# EAGLE board PCB (EAGLE 9.7.0)
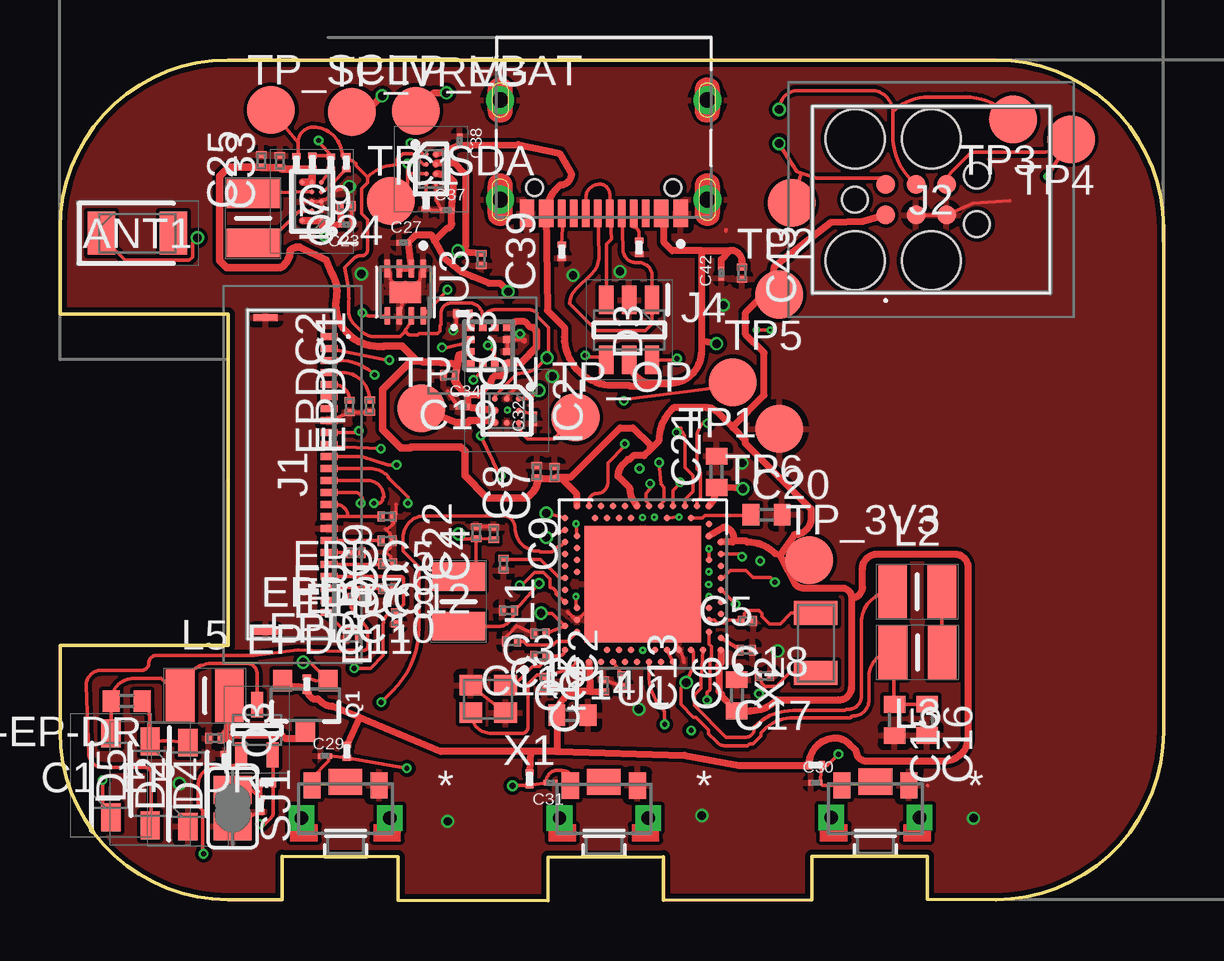
[diagram p0: board, top side]
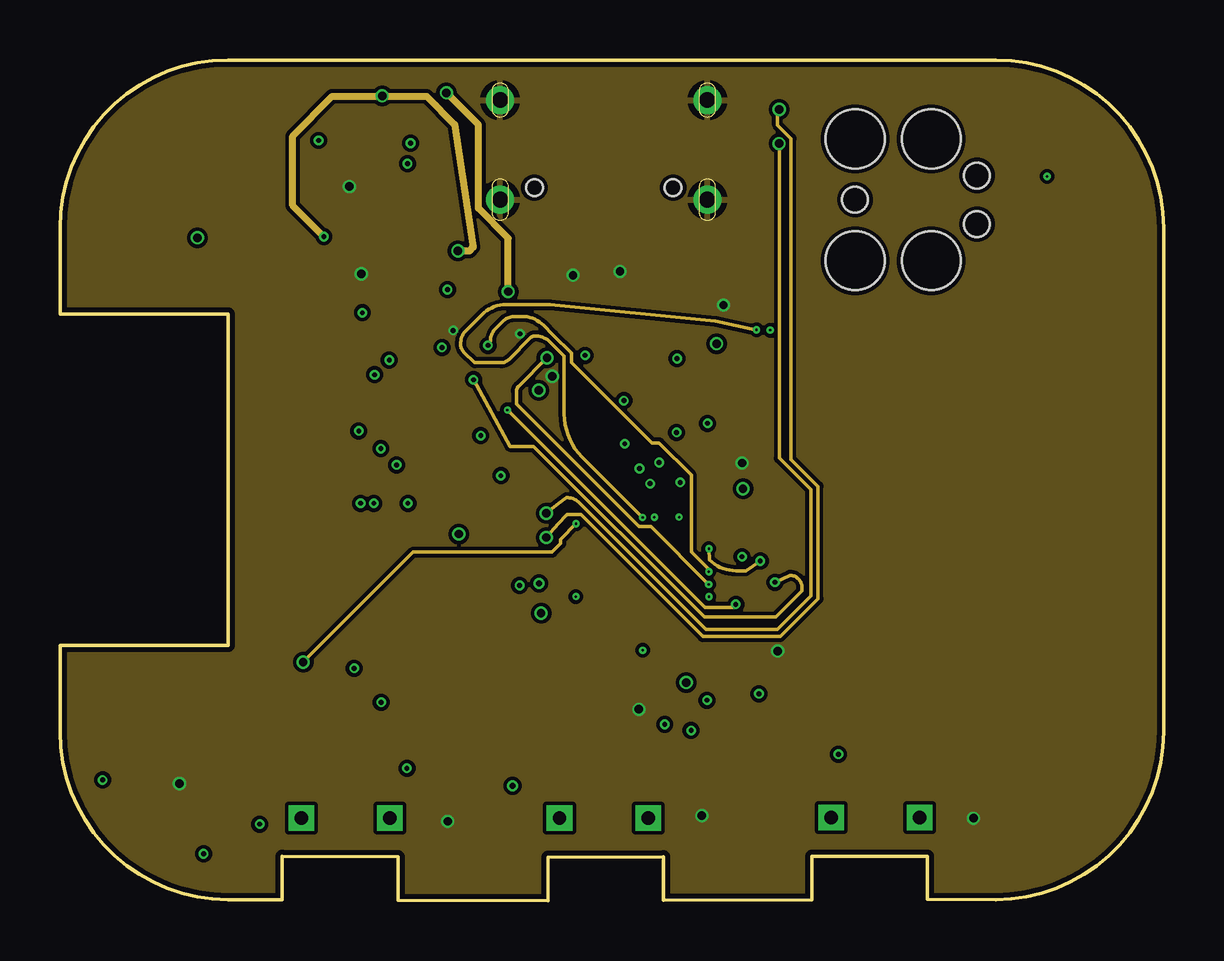
[diagram p1: board, inner layer Route2]
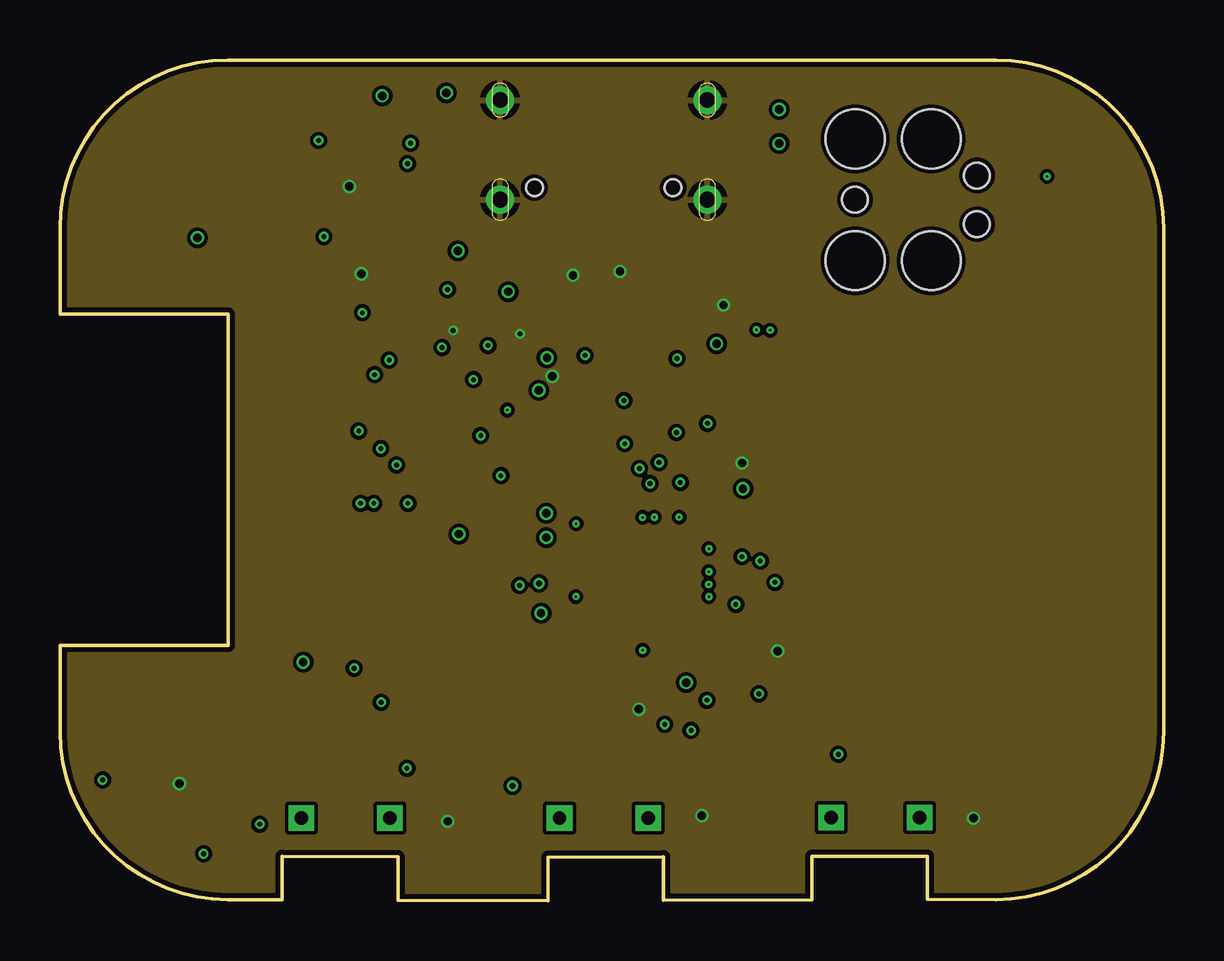
[diagram p2: board, inner layer Route15]
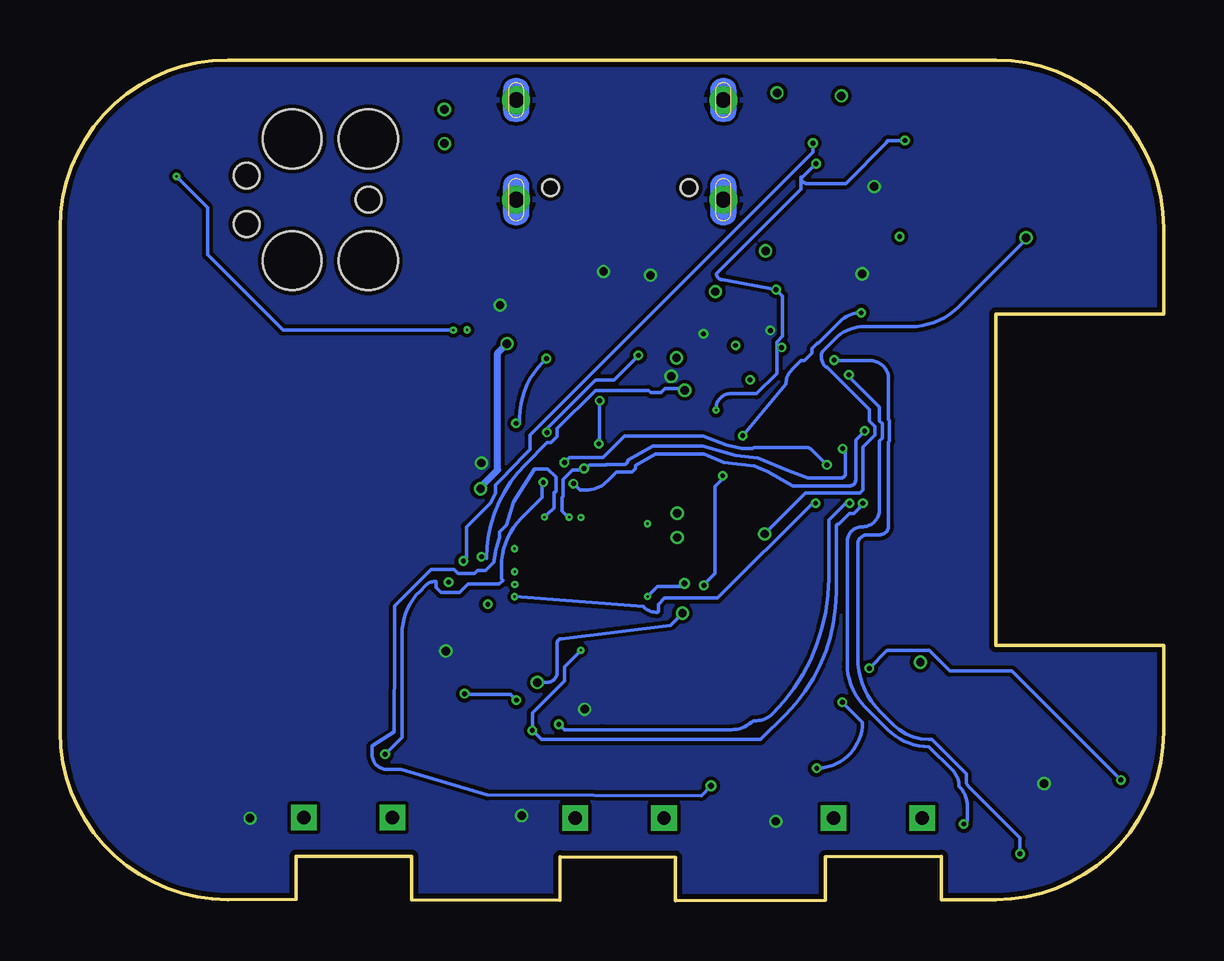
[diagram p3: board, bottom side, seen from below]

Size 46 x 35.05 mm. Coordinates in mm from the lower left corner, seen from the top.
Outline: 39,0.05 36.16,0.05 36.16,1.85 31.35,1.85 31.35,0.05 25.15,0.02 25.15,1.82 20.35,1.8 20.35,0 14.1,0.03 14.1,1.83 9.26,1.85 9.26,0.05 7,0.05 arc-90 0,7.05 0,10.65 7,10.65 7,24.45 0,24.45 0,28.05 arc-90 7,35.05 39,35.05 arc-90 46,28.05 46,7.05 arc-90 39,0.05
Copper layers (1+2*15+16): Top 0.035mm / dielectric 1.5mm / Route2 0.035mm / dielectric 0.15mm / Route15 0.035mm / dielectric 0.2mm / Bottom 0.035mm
Design rules "Fusion Electronics Design Rules *": minimum track width 0.13mm, minimum drill 0.1mm, track to track 6mil, track to pad 0.13mm, pad to pad 0.13mm, via to via 0.13mm, smd to smd 0.13mm, copper to edge 0.2mm, drill to drill 0.13mm, minimum pad ring 10mil, minimum via ring 0.1mm, stop-mask expansion 4mil, vias tented up to drill 9999mil, thermal gap 10mil

## Footprints (pad centres in the part's own frame; a part is rotated, then mirrored left to right if it is on the bottom)
2450AT18B100E_ANTC3216X140N = smd 1.15 x 1.8: 1 -1.5,0; 2 1.5,0
NORDIC_NRF_3_RESC0201_L = smd 0.28 x 0.43: 1 -0.255,0; 2 0.255,0
ESP32_C6_LIBRARY_1_ESP32_WROVER_EAGLE-LTSPICE_C0402 = smd 0.7 x 0.9: 1 -0.65,0; 2 0.65,0
GRM011R60J152KE01L_2_CAPC0201X13N = smd 0.22 x 0.23: 1 -0.185,0; 2 0.185,0
ESP32_C6_LIBRARY_5_SOD3716X135N = smd 1.15 x 0.8: 1 -1.75,0; 2 1.75,0
ESP32_C6_LIBRARY_3_SOT95P280X145-6N = smd 1.2 x 0.6: 1 -1.25,0.95; 2 -1.25,0; 3 -1.25,-0.95; 4 1.25,-0.95; 5 1.25,0; 6 1.25,0.95
BQ25180YBGR_BGA8C40P2X4_100X155X50 = smd 0.2 x 0.2: A1 -0.2,0.6; A2 0.2,0.6; B1 -0.2,0.2; B2 0.2,0.2; C1 -0.2,-0.2; C2 0.2,-0.2; D1 -0.2,-0.6; D2 0.2,-0.6
DRV2605YZFR_BGA9C50P3X3_144X144X62 = smd 0.25 x 0.25: A1 -0.5,0.5; A2 0,0.5; A3 0.5,0.5; B1 -0.5,0; B2 0,0; B3 0.5,0; C1 -0.5,-0.5; C2 0,-0.5; C3 0.5,-0.5
BMA423_BMA423 = smd 0.3 x 0.35: 1 -0.75,-0.775; 2 -0.25,-0.775; 3 0.25,-0.775; 4 0.75,-0.775; 7 0.75,0.775; 8 0.25,0.775; 9 -0.25,0.775; 10 -0.75,0.775 | smd 0.35 x 0.3: 5 0.775,-0.25; 6 0.775,0.25; 11 -0.775,0.25; 12 -0.775,-0.25
RT6160AWSC_BGA15C40P3X5_140X230X60 = smd 0.216 x 0.216: A1 -0.4,0.8; A2 0,0.8; A3 0.4,0.8; B1 -0.4,0.4; B2 0,0.4; B3 0.4,0.4; C1 -0.4,0; C2 0,0; C3 0.4,0; D1 -0.4,-0.4; D2 0,-0.4; D3 0.4,-0.4; E1 -0.4,-0.8; E2 0,-0.8; E3 0.4,-0.8
503480-2400_5034802400 = smd 0.3 x 0.7: 1 -5.75,1.525; 2 -5.25,1.525; 3 -4.75,1.525; 4 -4.25,1.525; 5 -3.75,1.525; 6 -3.25,1.525; 7 -2.75,1.525; 8 -2.25,1.525; 9 -1.75,1.525; 10 -1.25,1.525; 11 -0.75,1.525; 12 -0.25,1.525; 13 0.25,1.525; 14 0.75,1.525; 15 1.25,1.525; 16 1.75,1.525; 17 2.25,1.525; 18 2.75,1.525; 19 3.25,1.525; 20 3.75,1.525; 21 4.25,1.525; 22 4.75,1.525; 23 5.25,1.525; 24 5.75,1.525 | smd 0.3 x 1: MP1 -6.54,-1.125; MP2 6.54,-1.125
TC2030-IDC_TC2030IDC = smd 0.783 x 0.783: 1 -0.953,-0.635; 2 -0.953,0.635; 3 0.317,-0.635; 4 0.317,0.635; 5 1.588,-0.635; 6 1.588,0.635 | hole 2.451: -2.223,-2.54; -2.223,2.54; 0.952,-2.54; 0.952,2.54 | hole 1.067: -2.223,0; 2.857,-1.016; 2.857,1.016
KH-TYPE-C-16P_KINGHELM_KH-TYPE-C-16P = smd 0.6 x 1.15: A1_B12 -3.2,4.725; A4_B9 -2.4,4.725; A9_B4 2.4,4.725; A12_B1 3.2,4.725 | smd 0.3 x 1.15: A5 -1.25,4.725; A6 -0.25,4.725; A7 0.25,4.725; A8 1.25,4.725; B5 1.75,4.725; B6 0.75,4.725; B7 -0.75,4.725; B8 -1.75,4.725 | drill 0.65 pad 1.05: SH1 -4.32,0; SH2 4.32,0; SH3 -4.32,4.15; SH4 4.32,4.15 | hole 0.7: -2.89,3.65; 2.89,3.65
MLP2016SR47MT0S1_INDC2016X100N = smd 1.2 x 2.2: 1 -1.028,0; 2 1.028,0
ESP32_C6_LIBRARY_4_ESP32_C6_LIBRARY_4_ESP32_C6_LIBRARY_4_ESP32_C6_LIBRARY_4_ESP32_WROVER_SPARKFUN-DISCRETESEMI_SOT23-3 = smd 0.8 x 0.9: 1 -0.95,-1; 2 0.95,-1; 3 0,1.1
ESP32_C6_LIBRARY_6_SOT65P210X110-3N = smd 1.05 x 0.5: 1 -1.05,0.65; 2 -1.05,-0.65; 3 1.05,0
ERA-1AEB3401C_0201 = smd 0.35 x 0.25: 1 0,0.275; 2 0,-0.275
ESP32_C6_LIBRARY_7_JUMPER_SJ = smd 1.168 x 1.6: 1 -0.762,0; 2 0.762,0
2025-10-22_07-23-44_LIBRARY_SW_EVP-AKE31A_PAN = smd 0.711 x 1.092: 1 -1.4,-0.972; 2 1.4,-0.972 | drill 0.559 pad 0.914 square: 3 -1.848,0.381; 4 1.848,0.381 | smd 1.397 x 1.092: 5 0,-1.124
HECTOR_WATCH_1_TP20R = smd 2 x 2: TP 0,0
NRF52840-QIAA = smd 4.85 x 4.85: 74 0,0 | smd 0.275 x 0.275: A8 -1.25,3.25; A10 -0.75,3.25; A12 -0.25,3.25; A14 0.25,3.25; A16 0.75,3.25; A18 1.25,3.25; A20 1.75,3.25; A22 2.25,3.25; A23 2.75,3.25; AA24 3.25,-2.25; AB2 -2.75,-2.5; AC5 -2,-2.75; AC9 -1,-2.75; AC11 -0.5,-2.75; AC13 0,-2.75; AC15 0.5,-2.75; AC17 1,-2.75; AC19 1.5,-2.75; AC21 2,-2.75; AC24 3.25,-2.75; AD2 -2.75,-3.25; AD4 -2.25,-3.25; AD6 -1.75,-3.25; AD8 -1.25,-3.25; AD10 -0.75,-3.25; AD12 -0.25,-3.25; AD14 0.25,-3.25; AD16 0.75,-3.25; AD18 1.25,-3.25; AD20 1.75,-3.25; AD22 2.25,-3.25; AD23 2.75,-3.25; B1 -3.25,2.75; B3 -2.5,2.75; B5 -2,2.75; B7 -1.5,2.75; B9 -1,2.75; B11 -0.5,2.75; B13 0,2.75; B15 0.5,2.75; B17 1,2.75; B19 1.5,2.75; B24 3.25,2.75; C1 -3.25,2.25; D2 -2.75,2; D23 2.75,2; E24 3.25,1.75; F2 -2.75,1.5; F23 2.75,1.5; G1 -3.25,1.25; H2 -2.75,1; H23 2.75,1; J1 -3.25,0.75; J24 3.25,0.75; K2 -2.75,0.5; L1 -3.25,0.25; L24 3.25,0.25; M2 -2.75,0; N1 -3.25,-0.25; N24 3.25,-0.25; P2 -2.75,-0.5; P23 2.75,-0.5; R1 -3.25,-0.75; R24 3.25,-0.75; T2 -2.75,-1; T23 2.75,-1; U1 -3.25,-1.25; U24 3.25,-1.25; V23 2.75,-1.5; W1 -3.25,-1.75; W24 3.25,-1.75; Y2 -2.75,-2; Y23 2.75,-2
ESP32_C6_LIBRARY_SON50P200X200X80-9N = smd 0.76 x 0.27: 1 -0.985,0.75; 2 -0.985,0.25; 3 -0.985,-0.25; 4 -0.985,-0.75; 5 0.985,-0.75; 6 0.985,-0.25; 7 0.985,0.25; 8 0.985,0.75 | smd 0.9 x 1.3: 9 0,0
NORDIC_NRF_BT-XTAL_2016_N = smd 0.95 x 0.85: 1 -0.725,-0.575; 2 0.725,-0.575; 3 0.725,0.575; 4 -0.725,0.575
NORDIC_NRF_1_XTAL_3215_N = smd 1 x 1.8: 1 -1.25,0; 2 1.25,0

## Placement (x,y rotation side)
ANT1  2450AT18B100E_2450AT18B100E  [2450AT18B100E_ANTC3216X140N]  3.23,27.82 0 top
C1  12pF  [NORDIC_NRF_3_RESC0201_L]  20,10.21 180 top
C1_EP_DR  10uF  [NORDIC_NRF_3_RESC0201_L]  6.45,6.77 180 top
C2  N.C.  [NORDIC_NRF_3_RESC0201_L]  20.2,9.09 270 top
C2-EP-DR  4.7uF  [ESP32_C6_LIBRARY_1_ESP32_WROVER_EAGLE-LTSPICE_C0402]  2.78,8.32 180 top
C3  1pF  [NORDIC_NRF_3_RESC0201_L]  18.69,12.1 180 top
C4  1pF  [NORDIC_NRF_3_RESC0201_L]  18.08,15.31 90 top
C5  100nF  [NORDIC_NRF_3_RESC0201_L]  28.61,10.45 0 top
C6  4.7µF  [ESP32_C6_LIBRARY_1_ESP32_WROVER_EAGLE-LTSPICE_C0402]  28.22,8.56 90 top
C7  100nF  [NORDIC_NRF_3_RESC0201_L]  20.61,17.84 90 top
C8  100nF  [NORDIC_NRF_3_RESC0201_L]  19.88,17.88 90 top
C9  820pF  [NORDIC_NRF_3_RESC0201_L]  18.49,14.03 270 top
C10  N.C.  [NORDIC_NRF_3_RESC0201_L]  20,11.14 180 top
C11  100pF  [NORDIC_NRF_3_RESC0201_L]  18.82,10.81 180 top
C12  100nF  [NORDIC_NRF_3_RESC0201_L]  22.67,8.96 90 top
C13  N.C.  [NORDIC_NRF_3_RESC0201_L]  23.45,9.17 270 top
C14  4.7µF  [ESP32_C6_LIBRARY_1_ESP32_WROVER_EAGLE-LTSPICE_C0402]  21.36,7.73 0 top
C15  1.0µF  [ESP32_C6_LIBRARY_1_ESP32_WROVER_EAGLE-LTSPICE_C0402]  34.79,7.53 270 top
C16  47nF  [ESP32_C6_LIBRARY_1_ESP32_WROVER_EAGLE-LTSPICE_C0402]  36.14,7.54 270 top
C17  12pF  [NORDIC_NRF_3_RESC0201_L]  29.37,9.37 180 top
C18  12pF  [NORDIC_NRF_3_RESC0201_L]  28.65,11.66 180 top
C19  100nF  [NORDIC_NRF_3_RESC0201_L]  16.24,21.9 180 top
C20  4.7µF  [ESP32_C6_LIBRARY_1_ESP32_WROVER_EAGLE-LTSPICE_C0402]  29.45,16.09 0 top
C21  4.7µF  [ESP32_C6_LIBRARY_1_ESP32_WROVER_EAGLE-LTSPICE_C0402]  27.37,17.88 90 top
C22  N.C.  [NORDIC_NRF_3_RESC0201_L]  17.35,15.34 90 top
C23  0.1uF  [GRM011R60J152KE01L_2_CAPC0201X13N]  11.92,28.2 180 top
C24  10uF  [NORDIC_NRF_3_RESC0201_L]  11.93,28.95 180 top
C25  22nF  [NORDIC_NRF_3_RESC0201_L]  8.39,30.84 90 top
C27  0.1uF  [GRM011R60J152KE01L_2_CAPC0201X13N]  14.32,27.42 0 top
C29  1uF  [GRM011R60J152KE01L_2_CAPC0201X13N]  11.05,6.04 0 top
C30  1uF  [GRM011R60J152KE01L_2_CAPC0201X13N]  31.5,4.91 0 top
C31  1uF  [GRM011R60J152KE01L_2_CAPC0201X13N]  20.45,4.92 180 top
C32  1uF  [GRM011R60J152KE01L_2_CAPC0201X13N]  19.76,20.09 90 top
C33  22nF  [NORDIC_NRF_3_RESC0201_L]  9.17,30.81 90 top
C34  01.uF  [GRM011R60J152KE01L_2_CAPC0201X13N]  16.78,20.59 0 top
C37  1uF  [GRM011R60J152KE01L_2_CAPC0201X13N]  16.14,28.78 0 top
C38  1uF  [GRM011R60J152KE01L_2_CAPC0201X13N]  16.66,31.68 270 top
C39  10nF  [NORDIC_NRF_3_RESC0201_L]  17.56,26.73 270 top
C42  0.1uF  [GRM011R60J152KE01L_2_CAPC0201X13N]  27.56,26.15 90 top
C43  4.7nF  [NORDIC_NRF_3_RESC0201_L]  28.43,26.16 270 top
D2  ESP32_C6_LIBRARY_5_MBR0530  [ESP32_C6_LIBRARY_5_SOD3716X135N]  3.76,4.89 270 top
D3  ESP32_C6_LIBRARY_3_USBLC6-2SC6Y  [ESP32_C6_LIBRARY_3_SOT95P280X145-6N]  23.73,23.79 270 top
D4  ESP32_C6_LIBRARY_5_MBR0530  [ESP32_C6_LIBRARY_5_SOD3716X135N]  5.34,4.85 90 top
D5  ESP32_C6_LIBRARY_5_MBR0530  [ESP32_C6_LIBRARY_5_SOD3716X135N]  2.13,5.22 90 top
EPDC1  1uF/50V  [NORDIC_NRF_3_RESC0201_L]  12.91,20.61 90 top
EPDC2  1uF/50V  [NORDIC_NRF_3_RESC0201_L]  12.07,20.6 90 top
EPDC5  1uF/50V  [NORDIC_NRF_3_RESC0201_L]  13.64,16.02 180 top
EPDC6  1uF/50V  [NORDIC_NRF_3_RESC0201_L]  13.64,15.01 180 top
EPDC7  1uF/50V  [NORDIC_NRF_3_RESC0201_L]  12.34,14.51 180 top
EPDC8  1uF/50V  [NORDIC_NRF_3_RESC0201_L]  13.67,14.04 180 top
EPDC9  1uF/50V  [NORDIC_NRF_3_RESC0201_L]  14.01,11.79 90 top
EPDC10  1uF/50V  [NORDIC_NRF_3_RESC0201_L]  13.65,13.01 180 top
EPDC11  1uF/50V  [NORDIC_NRF_3_RESC0201_L]  12.38,12.61 180 top
EPDC12  1uF/50V  [NORDIC_NRF_3_RESC0201_L]  12.2,10.96 0 top
IC1  BQ25180YBGR_BQ25180YBGR  [BQ25180YBGR_BGA8C40P2X4_100X155X50]  15.47,30.5 0 top
IC2  DRV2605YZFR_DRV2605YZFR  [DRV2605YZFR_BGA9C50P3X3_144X144X62]  18.63,20.43 270 top
IC3  BMA423_BMA423  [BMA423_BMA423]  17.87,23.14 270 top
IC9  RT6160AWSC_RT6160AWSC  [RT6160AWSC_BGA15C40P3X5_140X230X60]  10.5,29.15 180 top
J1  503480-2400_503480-2400  [503480-2400_5034802400]  9.69,17.77 270 top
J2  TC2030-IDC_TC2030-IDC  [TC2030-IDC_TC2030IDC]  35.37,29.22 0 top
J4  KH-TYPE-C-16P_KH-TYPE-C-16P  [KH-TYPE-C-16P_KINGHELM_KH-TYPE-C-16P]  22.67,33.38 180 top
L1  MLP2016SR47MT0S1_FTC252012SR47MBCA  [MLP2016SR47MT0S1_INDC2016X100N]  16.61,12.47 90 top
L2  10µH  [MLP2016SR47MT0S1_INDC2016X100N]  35.73,12.88 180 top
L3  15nH  [MLP2016SR47MT0S1_INDC2016X100N]  35.74,10.35 0 top
L5  68uH  [MLP2016SR47MT0S1_INDC2016X100N]  6.04,8.55 180 top
L7  MLP2016SR47MT0S1_FTC252012SR47MBCA  [MLP2016SR47MT0S1_INDC2016X100N]  8.05,28.45 90 top
Q1  20V/4.2A/52mΩ/1.4W  [ESP32_C6_LIBRARY_4_ESP32_C6_LIBRARY_4_ESP32_C6_LIBRARY_4_ESP32_C6_LIBRARY_4_ESP32_WROVER_SPARKFUN-DISCRETESEMI_SOT23-3]  10.23,8.17 180 top
Q3  ESP32_C6_LIBRARY_6_SI1308EDL-T1-GE3  [ESP32_C6_LIBRARY_6_SOT65P210X110-3N]  8.21,7.13 90 top
R1_EP_DR  0.47  [ERA-1AEB3401C_0201]  8.61,4.91 90 top
R1_USB  5K1  [ERA-1AEB3401C_0201]  24.14,27.24 180 top
R2  0  [ERA-1AEB3401C_0201]  11.29,30.75 0 top
R2_EP_DR  10K  [ERA-1AEB3401C_0201]  6.88,5.85 0 top
R2_USB  5K1  [ERA-1AEB3401C_0201]  20.91,27.07 0 top
R3  0  [ERA-1AEB3401C_0201]  16.79,24.47 90 top
R4  0  [ERA-1AEB3401C_0201]  11.93,30.77 0 top
R5  10K  [ERA-1AEB3401C_0201]  31.49,5.65 270 top
R7  10K  [ERA-1AEB3401C_0201]  11.96,6.22 180 top
R8  10K  [ERA-1AEB3401C_0201]  19.57,5.07 180 top
R9  10K  [ERA-1AEB3401C_0201]  15.26,29.11 180 top
R17  ERA-1AEB3401C_CPF0201D7K68C1  [ERA-1AEB3401C_0201]  9.86,30.77 180 top
R18  ERA-1AEB3401C_CPF0201D7K68C1  [ERA-1AEB3401C_0201]  10.52,30.78 180 top
R_PWR_EPD  10K  [ERA-1AEB3401C_0201]  10.29,9.02 0 top
R_TYPE_SEL  2.2  [ERA-1AEB3401C_0201]  8.35,3.98 180 top
SJ1  0  [ESP32_C6_LIBRARY_7_JUMPER_SJ]  7.2,3.86 270 top
SW_DN  2025-10-22_07-23-44_LIBRARY_EVP-AKE31ASW_EVP-AKE31A_PAN  [2025-10-22_07-23-44_LIBRARY_SW_EVP-AKE31A_PAN]  11.9,3.83 180 top
SW_ENT  2025-10-22_07-23-44_LIBRARY_EVP-AKE31ASW_EVP-AKE31A_PAN  [2025-10-22_07-23-44_LIBRARY_SW_EVP-AKE31A_PAN]  22.67,3.83 180 top
SW_UP  2025-10-22_07-23-44_LIBRARY_EVP-AKE31ASW_EVP-AKE31A_PAN  [2025-10-22_07-23-44_LIBRARY_SW_EVP-AKE31A_PAN]  33.99,3.84 180 top
TP1  HECTOR_WATCH_1_TPTP20R  [HECTOR_WATCH_1_TP20R]  28.04,21.61 180 top
TP2  HECTOR_WATCH_1_TPTP20R  [HECTOR_WATCH_1_TP20R]  30.49,29.08 180 top
TP3  HECTOR_WATCH_1_TPTP20R  [HECTOR_WATCH_1_TP20R]  39.73,32.57 180 top
TP4  HECTOR_WATCH_1_TPTP20R  [HECTOR_WATCH_1_TP20R]  42.14,31.74 180 top
TP5  HECTOR_WATCH_1_TPTP20R  [HECTOR_WATCH_1_TP20R]  29.97,25.27 180 top
TP6  HECTOR_WATCH_1_TPTP20R  [HECTOR_WATCH_1_TP20R]  29.99,19.67 180 top
TP_3V3  HECTOR_WATCH_1_TPTP20R  [HECTOR_WATCH_1_TP20R]  31.23,14.2 0 top
TP_ON  HECTOR_WATCH_1_TPTP20R  [HECTOR_WATCH_1_TP20R]  15.07,20.53 0 top
TP_OP  HECTOR_WATCH_1_TPTP20R  [HECTOR_WATCH_1_TP20R]  21.49,20.15 0 top
TP_SCL  HECTOR_WATCH_1_TPTP20R  [HECTOR_WATCH_1_TP20R]  8.8,32.96 0 top
TP_SDA  HECTOR_WATCH_1_TPTP20R  [HECTOR_WATCH_1_TP20R]  13.79,29.17 0 top
TP_VBAT  HECTOR_WATCH_1_TPTP20R  [HECTOR_WATCH_1_TP20R]  14.83,32.93 0 top
TP_VREG  HECTOR_WATCH_1_TPTP20R  [HECTOR_WATCH_1_TP20R]  12.17,32.88 0 top
U1  NRF52840-QIAA-R  [NRF52840-QIAA]  24.3,13.2 180 top
U3  ESP32_C6_LIBRARY_MAX17048G+T10  [ESP32_C6_LIBRARY_SON50P200X200X80-9N]  14.4,25.36 270 top
X1  32MHz  [NORDIC_NRF_BT-XTAL_2016_N]  17.85,8.41 180 top
X2  32.768kH  [NORDIC_NRF_1_XTAL_3215_N]  31.5,10.74 90 top

## Library data of the parts
ANT1 = InkTime_v5; ARROW_PART_NUMBER: 2450AT18B100E; ARROW_PRICE-STOCK: https://www.arrow.com/en/products/2450at18b100e/johanson-dielectrics?utm_currency=USD&region=nac; DESCRIPTION: Antennas 2.45GHz ANTENNA; HEIGHT: 1.4mm; MANUFACTURER_NAME: JOHANSON TECHNOLOGY; MANUFACTURER_PART_NUMBER: 2450AT18B100E; MOUSER_PART_NUMBER: 609-2450AT18B100E; MOUSER_PRICE-STOCK: https://www.mouser.co.uk/ProductDetail/Johanson-Technology/2450AT18B100E?qs=yCnrNFeXz%252Bh5MFsFIXGZGA%3D%3D
C1 C1_EP_DR C2-C5 C7-C13 C17-C19 C22 C24 C25 C33 C39 C43 EPDC1 EPDC2 EPDC5-EPDC12 R1_EP_DR R1_USB R2_EP_DR R2_USB R5 R7 R8 R17 R18 R_PWR_EPD R_TYPE_SEL SJ1 TP1-TP6 TP_3V3 TP_ON TP_OP TP_SCL TP_SDA TP_VBAT TP_VREG X1 X2 = InkTime_v5
C2-EP-DR C6 C14-C16 C20 C21 = InkTime_v5; SPICEMODEL: NONE; SPICEPREFIX: C
C23 C27 C29-C32 C34 C37 C38 C42 = InkTime_v5; AVAILABILITY: In Stock; CHECK_PRICES: https://www.snapeda.com/parts/GRM011R60J152KE01L/Murata/view-part/?ref=eda; DESCRIPTION: SMD Capacitor X5R(EIA) with Capacitance: 1500pF Tol. 10%. Rated Voltage: 6.3Vdc; MF: Murata; MP: GRM011R60J152KE01L; PACKAGE: 0201 Murata; PRICE: None; SNAPEDA_LINK: https://www.snapeda.com/parts/GRM011R60J152KE01L/Murata/view-part/?ref=snap
D2 D4 D5 = InkTime_v5; AVAILABILITY: In Stock; CHECK_PRICES: https://www.snapeda.com/parts/MBR0530/Onsemi/view-part/?ref=eda; DESCRIPTION: Diode Schottky 30 V 500mA Surface Mount SOD-123; MF: ON Semiconductor; MP: MBR0530; PACKAGE: SOD-123-2 ON Semiconductor; PRICE: None; PURCHASE-URL: https://www.snapeda.com/api/url_track_click_mouser/?unipart_id=179458&manufacturer=ON Semiconductor&part_name=MBR0530&search_term=None; SNAPEDA_LINK: https://www.snapeda.com/parts/MBR0530/Onsemi/view-part/?ref=snap
D3 = InkTime_v5; AVAILABILITY: In Stock; CHECK_PRICES: https://www.snapeda.com/parts/USBLC6-2SC6Y/STMicroelectronics/view-part/?ref=eda; DESCRIPTION: 17V Clamp 5A (8/20µs) Ipp Tvs Diode Surface Mount SOT-23-6; MF: STMicroelectronics; MP: USBLC6-2SC6Y; PACKAGE: SOT-23-6 STMicroelectronics; PRICE: None; SNAPEDA_LINK: https://www.snapeda.com/parts/USBLC6-2SC6Y/STMicroelectronics/view-part/?ref=snap
IC1 = InkTime_v5; ARROW_PART_NUMBER: BQ25180YBGR; ARROW_PRICE-STOCK: https://www.arrow.com/en/products/bq25180ybgr/texas-instruments?utm_currency=USD&region=nac; DESCRIPTION: Charger IC Lithium Ion/Polymer, Lithium Iron Phosphate 8-DSBGA (1.6x1.1); HEIGHT: 0.5mm; MANUFACTURER_NAME: Texas Instruments; MANUFACTURER_PART_NUMBER: BQ25180YBGR; MOUSER_PART_NUMBER: 595-BQ25180YBGR; MOUSER_PRICE-STOCK: https://www.mouser.co.uk/ProductDetail/Texas-Instruments/BQ25180YBGR?qs=doiCPypUmgEWjAK%252BJAX6Tw%3D%3D
IC2 = InkTime_v5; ARROW_PART_NUMBER: DRV2605YZFR; ARROW_PRICE-STOCK: https://www.arrow.com/en/products/drv2605yzfr/texas-instruments?region=nac; DESCRIPTION: Haptic Driver for ERM/LRA with Built-In Library and Smart Loop Architecture; HEIGHT: 0.625mm; MANUFACTURER_NAME: Texas Instruments; MANUFACTURER_PART_NUMBER: DRV2605YZFR
IC3 = InkTime_v5; ARROW_PART_NUMBER: BMA423; ARROW_PRICE-STOCK: https://www.arrow.com/en/products/bma423/bosch; DESCRIPTION: Accelerometers Triaxial low-g 12bit Acceleration Sensor; HEIGHT: 1mm; MANUFACTURER_NAME: BOSCH; MANUFACTURER_PART_NUMBER: BMA423; MOUSER_PART_NUMBER: 262-BMA423; MOUSER_PRICE-STOCK: https://www.mouser.co.uk/ProductDetail/Bosch-Sensortec/BMA423?qs=HXFqYaX1Q2xC%252BSgeGoX3mg%3D%3D
IC9 = InkTime_v5; DESCRIPTION: Buck-Boost Regulator Positive Output Step-Up/Step-Down I2C DC-DC Controller IC 15-WL-CSP (BSC) (1.4x2.3); HEIGHT: 0.6mm; MANUFACTURER_NAME: RICHTEK; MANUFACTURER_PART_NUMBER: RT6160AWSC; MOUSER_PART_NUMBER: 835-RT6160AWSC; MOUSER_PRICE-STOCK: https://www.mouser.co.uk/ProductDetail/Richtek/RT6160AWSC?qs=amGC7iS6iy%2FLd9PSoixZXQ%3D%3D
J1 = InkTime_v5; DESCRIPTION: FFC & FPC Connectors 0.5mm FPC RA SMT Dual Contact 24Ckt; HEIGHT: 1.87mm; MANUFACTURER_NAME: Molex; MANUFACTURER_PART_NUMBER: 503480-2400; MOUSER_PART_NUMBER: 538-503480-2400; MOUSER_PRICE-STOCK: https://www.mouser.co.uk/ProductDetail/Molex/503480-2400?qs=OAhjpuo3Vu7efIoxFh9AOw%3D%3D
J2 = InkTime_v5; DESCRIPTION: CABLE ADAPTER 6 POS; HEIGHT: 19mm; MANUFACTURER_NAME: Tag Connect; MANUFACTURER_PART_NUMBER: TC2030-IDC
J4 = InkTime_v5; AVAILABILITY: Not in stock; CHECK_PRICES: https://www.snapeda.com/parts/KH-TYPE-C-16P/Kinghelm/view-part/?ref=eda; MF: kinghelm; MP: KH-TYPE-C-16P; PACKAGE: None; PRICE: None; SNAPEDA_LINK: https://www.snapeda.com/parts/KH-TYPE-C-16P/Kinghelm/view-part/?ref=snap
L1 L5 L7 = InkTime_v5; DESCRIPTION: SMD / SMT Inductors (Coils), L=0.47?H, L x W x T :; HEIGHT: 1mm; JLCPCB: https://jlcpcb.com/partdetail/6763488-FTC252012SR47MBCA/C5832368; MANUFACTURER_NAME: TDK; MANUFACTURER_PART_NUMBER: FTC252012SR47MBCA
L2 = InkTime_v5; DESCRIPTION: SMD / SMT Inductors (Coils), L=0.47?H, L x W x T :; HEIGHT: 1mm; JLCPCB: https://jlcpcb.com/partdetail/6763488-FTC252012SR47MBCA/C5832368; L2: 10µH; MANUFACTURER_NAME: TDK; MANUFACTURER_PART_NUMBER: FTC252012SR47MBCA
L3 = InkTime_v5; DESCRIPTION: SMD / SMT Inductors (Coils), L=0.47?H, L x W x T :; HEIGHT: 1mm; JLCPCB: https://jlcpcb.com/partdetail/6763488-FTC252012SR47MBCA/C5832368; L3: 15nH; MANUFACTURER_NAME: TDK; MANUFACTURER_PART_NUMBER: FTC252012SR47MBCA
Q1 = InkTime_v5; PROD_ID: TRAN-14388
Q3 = InkTime_v5; AVAILABILITY: In Stock; CHECK_PRICES: https://www.snapeda.com/parts/SI1308EDL-T1-GE3/Vishay+Siliconix/view-part/?ref=eda; DESCRIPTION: Si1308EDL-T1-GE3 N-channel MOSFET Transistor, 1.5 A, 30 V, 3-Pin SC-70 | Siliconix / Vishay SI1308EDL-T1-GE3; MF: Vishay Siliconix; MP: SI1308EDL-T1-GE3; PACKAGE: SOT-323 Vishay Semiconductor; PRICE: None; PURCHASE-URL: https://www.snapeda.com/api/url_track_click_mouser/?unipart_id=274603&manufacturer=Vishay Siliconix&part_name=SI1308EDL-T1-GE3&search_term=None; SNAPEDA_LINK: https://www.snapeda.com/parts/SI1308EDL-T1-GE3/Vishay+Siliconix/view-part/?ref=snap
R2 = InkTime_v5; R4: 0
R3 R4 = InkTime_v5; R2: 0
R9 = InkTime_v5; R9: 10K
SW_DN SW_ENT SW_UP = InkTime_v5; COPYRIGHT: Copyright (C) 2025 Ultra Librarian. All rights reserved.; DIGI-KEY_PART_NUMBER_1: P123437TR-ND; DIGI-KEY_PART_NUMBER_2: P123437CT-ND; DIGI-KEY_PART_NUMBER_3: P123437DKR-ND; MANUFACTURER_NAME: Panasonic; MANUFACTURER_PART_NUMBER: EVP-AKE31A
U1 = IC_Wireless-RF; CATEGORY: RF and Wireless ICs; DATASHEET: https://mm.digikey.com/Volume0/opasdata/d220001/medias/docus/6470/NRF52840-QIAA-R.pdf; DESCRIPTION: IC RF TxRx + MCU 802.15.4 Bluetooth Bluetooth v5.0 2.4 GHz 73-VFQFN Dual Rows Exposed Pad; FREQUENCY: 2.4 GHz; GPIO: 48; MANUFACTURER: Nordic Semiconductor ASA; MPN: NRF52840-QIAA-R; OPERATING_TEMPERATURE: -40°C ~ 85°C; PACKAGE_SIZE: 73-VFQFN; PACKAGE_TYPE: Surface Mount; PART_STATUS: Active; ROHS: Compliant; SERIES: NRF52840; SUBCATEGORY: Bluetooth; TYPE: TxRx + MCU
U3 = InkTime_v5; AVAILABILITY: In Stock; CHECK_PRICES: https://www.snapeda.com/parts/MAX17048G+T10/Analog+Devices/view-part/?ref=eda; DESCRIPTION: 3µA 1-Cell/2-Cell Fuel Gauge with ModelGauge; MF: Analog Devices; MP: MAX17048G+T10; PACKAGE: TDFN-8 Maxim; PRICE: None; PURCHASE-URL: https://www.snapeda.com/api/url_track_click_mouser/?unipart_id=329239&manufacturer=Analog Devices&part_name=MAX17048G+T10&search_term=None; SNAPEDA_LINK: https://www.snapeda.com/parts/MAX17048G+T10/Analog+Devices/view-part/?ref=snap

## Nets
3V3: C6.1 C7.1 C8.1 C12.1 C14.1 C19.1 C25.1 C33.1 C34.2 IC2.C2 IC3.3 IC3.7 IC3.10 IC9.E2 IC9.E3 J2.1 Q1.2 R5.2 R7.2 R8.2 R17.1 R18.1 R_PWR_EPD.2 TP5.TP TP_3V3.TP U1.A22 U1.AD14 U1.AD23 U1.B1 U1.W1 U1.Y2
ALERT: U1.J24 U3.5
D+: D3.4 U1.AD6
D-: D3.6 U1.AD4
DCCH: U1.AB2
DN: D3.1 J4.A7 J4.B7
DP: D3.3 J4.A6 J4.B6
EPD_3V3: C1_EP_DR.1 L5.1 Q1.3
EPD_BUSY: J1.9 U1.AD12
EPD_CS: J1.12 U1.K2
EPD_DC: J1.11 U1.AD10
EPD_RST: J1.10 U1.AC11
GDR: J1.2 Q3.1 R2_EP_DR.2
GND: C1.2 C1_EP_DR.2 C2.2 C3.2 C4.2 C5.2 C6.2 C7.2 C8.2 C9.2 C10.2 C11.2 C12.2 C13.2 C14.2 C15.2 C16.2 C17.1 C18.1 C19.2 C20.2 C21.2 C22.2 C23.1 C24.1 C25.2 C27.1 C29.1 C30.1 C31.1 C32.1 C33.2 C34.1 C37.1 C38.1 C39.2 C42.1 C43.2 D3.2 D4.1 EPDC1.1 EPDC2.1 EPDC5.1 EPDC6.1 EPDC7.1 EPDC8.1 EPDC9.1 EPDC10.1 EPDC11.1 EPDC12.1 IC1.D2 IC2.B1 IC2.B3 IC3.8 IC3.9 IC9.B1 IC9.C1 IC9.C2 IC9.C3 J1.8 J1.17 J1.MP1 J1.MP2 J2.3 J2.5 J4.A1_B12 J4.A12_B1 J4.SH1 J4.SH2 J4.SH3 J4.SH4 R1_USB.1 R2_EP_DR.1 R2_USB.2 R3.1 R9.1 R_TYPE_SEL.1 SJ1.2 SW_DN.1 SW_ENT.1 SW_UP.1 TP6.TP U1.74 U1.B7 U1.F23 U3.1 U3.4 U3.6 U3.9 X1.2 X1.4
HAPTIC_EN: IC2.A1 U1.U1
IMU_INT1: IC3.5 U1.N1
IMU_INT2: IC3.6 U1.P2
LX1: IC9.B2 IC9.B3 L7.1
LX2: IC9.D2 IC9.D3 L7.2
MOSI: J1.14 U1.B13
N$1: IC1.D1 R9.2
N$2: IC9.D1 R4.2
N$4: IC9.E1 R2.2
N$5: L2.1 L3.2
N$6: L2.2 U1.B3
N$7: C5.1 U1.C1
N$8: C10.1 C15.1 C16.1 L3.1 U1.B5 U1.E24
N$9: C17.2 U1.D2 X2.1
N$10: C13.1 U1.A18
N$11: IC3.1 R3.2
N$12: C18.2 U1.F2 X2.2
N$14: C11.1 U1.D23
N$15: C20.1 U1.AC5
N$16: C1.1 U1.B24 X1.1
N$17: C2.1 U1.A23 X1.3
N$18: C32.2 IC2.A2
N$19: C3.1 L1.1 U1.H23
N$20: ANT1.1 C4.1 C22.1 L1.2
N$22: C9.1 U1.N24
N$23: C2-EP-DR.1 D2.1 D4.2
N$24: C2-EP-DR.2 D5.2 L5.2 Q3.3
N$27: EPDC1.2 J1.4
N$28: J4.A5 R1_USB.2
N$29: R1_EP_DR.1 R_TYPE_SEL.2 SJ1.1
N$30: J4.B5 R2_USB.1
N$31: EPDC2.2 J1.5
N$40: EPDC5.2 J1.15 J1.16
N$41: EPDC6.2 J1.18
N$42: EPDC7.2 J1.19
N$43: EPDC8.2 J1.20
N$44: EPDC10.2 J1.22
N$46: EPDC12.2 J1.24
OUT+: IC2.A3 TP_OP.TP
OUT-: IC2.C3 TP_ON.TP
P0.04: U1.J1
P0.09: U1.L24
P0.13: C30.2 R5.1 SW_UP.2 U1.AD8
P0.14: C31.2 R8.1 SW_ENT.2 U1.AC9
P0.19: U1.AC15
P0.20: U1.AD16
P0.21: U1.AC17
P0.22: U1.AD18
P0.23: U1.AC19
P0.24: U1.AD20
P0.26: U1.G1
P0.27: U1.H2
P0.28: U1.B11
P0.29: U1.A10
P0.31: U1.A8 U1.B9
P1.01: Q1.1 R_PWR_EPD.1 U1.Y23
P1.02: C29.2 R7.1 SW_DN.2 U1.W24
P1.03: U1.V23
P1.04: U1.U24
P1.05: U1.T23
P1.06: U1.R24
P1.07: U1.P23
P1.09: U1.R1
P1.10: U1.A20
P1.11: U1.B19
P1.12: U1.B17
P1.13: U1.B15
P1.14: U1.A16
P1.15: U1.A14
PMIC_INT: IC1.A1 U1.T2
PO.25: U1.AC21
PREVGH: D5.1 EPDC9.2 J1.21
PREVGL: D2.2 EPDC11.2 J1.23
RESE: J1.3 Q3.2 R1_EP_DR.2
RESET: J2.6 TP4.TP U1.AC13
SCK: J1.13 U1.A12
SCL: IC1.B1 IC2.C1 IC3.12 R4.1 R17.2 TP_SCL.TP U1.M2 U3.7
SDA: IC1.C1 IC2.B2 IC3.2 R2.1 R18.2 TP_SDA.TP U1.L1 U3.8
SWDCLK: J2.4 TP3.TP U1.AA24
SWDIO: J2.2 TP2.TP U1.AC24
SWO: TP1.TP U1.AD22
VBAT: C27.2 C37.2 IC1.C2 TP_VBAT.TP U3.2 U3.3
VBUS: C21.1 C38.2 C42.2 C43.1 D3.5 IC1.A2 J4.A4_B9 J4.A9_B4 U1.AD2
VREG: C23.2 C24.2 C39.1 IC1.B2 IC9.A1 IC9.A2 IC9.A3 TP_VREG.TP

## Tracks (layer width: path | path; a pad name or v marks a point on that pad's centre or on a via)
3V3
  Top 0.3: U1.A22 22.09,8.95 22.1,8.72 | 22.1,8.72 C12.1 | U1.AD23 21.55,16.95 20.83,17.66 | 19.62,6.22 20.68,6.22 arc90 20.7,6.23 20.71,6.23 | 30.01,14.39 29.82,14.47 arc45 28.66,14.95 28.64,14.95 28.59,15 28.09,15 | 30.01,14.39 30.05,14.37 30.35,13.77 | 33,12.62 arc90 32.59,13.03 31.01,13.03 arc-45 30.65,13.19 30.35,13.76 30.35,13.77 | 33,12.62 33,8.91 arc-90 32.45,8.36 arc45 32.43,8.37 29.88,8.37 arc-45 28.79,7.92 28.23,7.92 arc90 C6.1 27.58,8.55 27.58,8.61 27.46,8.73 27.46,9.79 arc-90 27.52,9.85 27.55,9.87 U1.B1 | 30.01,14.39 30.61,15.25 arc90 31.31,15.95 31.31,16.33 28.56,19.08 28.56,19.21 28.05,19.72 | U1.AD14 24.05,16.49 arc-45 23.75,17.2 23.25,17.7 arc-45 23.45,18.17 23.67,18.39 23.74,18.39 23.9,18.55 24.35,18.55 24.58,18.79 | 24.58,18.79 24.97,19.17 arc-45 25.51,20.49 25.58,20.55 26.94,20.55 arc-45 27.42,20.36 28.05,19.72 | 19.62,6.22 15.87,6.22 12.49,7.63 | C8.1 arc90 19.91,17.59 C7.1 20.68,17.66 20.83,17.66 | 33,12.62 arc90 33.45,13.07 33.45,13.84 arc-90 34.07,14.45 37.29,14.45 arc-90 37.85,13.9 37.85,6.81 arc-90 36.86,5.82 33.62,5.82 arc-90 33.2,6.24 32.89,6.54 arc45 32.33,6.77 arc90 R5.2 31.04,5.65 28.29,5.64 26.03,6.07 20.71,6.23 | 12.49,7.63 11.37,8.1 arc-45 10.87,8.31 10.76,8.42 10.53,8.42 10.35,8.61 10.35,8.7 R_PWR_EPD.2 10.15,8.89 10,8.89 9.99,8.91 9.55,8.91 arc-90 Q1.2 | 12.49,7.63 R7.2 | 19.62,6.22 R8.2 | 22.1,8.72 21.7,8.72 arc90 C14.1 20.71,6.23 | IC3.7 18.58,22.32 18.58,22.07 18.4,21.89 18.15,21.89 18.01,21.76 arc45 17.99,21.7 arc-45 17.94,21.58 17.84,21.48 17.84,21.47 17.45,21.08 17.44,21.08 | 19.74,23.89 arc90 19.73,23.89 19.62,23.89 19.38,24.13 18.97,24.13 18.73,23.89 IC3.10
  Top 0.3: 28.09,15 28.09,15.13 arc90 27.65,15.56 U1.Y2 | 28.09,15 28.04,14.95 U1.W1 | 28.05,19.72 28.05,19.78 29.35,21.07 29.35,22.84 28.58,23.61 28.58,24.51 29.66,25.59 | 29.66,25.59 29.78,26.42 32.13,28.28 33.46,28.32 J2.1 | TP5.TP arc-90 29.66,25.58 29.66,25.59 | TP_3V3.TP 31.21,14.2 30.35,13.77 | 24.58,18.79 24.58,19.01 23.88,19.71 23.35,19.71 21.3,17.66 20.83,17.66
  Top 0.305: IC9.E3 IC9.E2 10.5,30.48 | 10.5,30.48 arc-45 R18.1 | 10.5,30.48 arc45 10.47,30.49 R17.1 9.32,30.49 arc-45 C33.1 8.47,30.56 arc-45 C25.1 7.03,30.59 6.65,30.2 6.65,26.69 6.95,26.39 9.07,26.39 arc45 9.34,26.5 arc45 9.59,27.09 arc-45 9.98,27.25 11.09,26.7 11.32,26.16 arc-43 11.52,25.18 arc100 13.26,23.11 13.49,23.11 13.5,23.12 14.26,23.12 14.87,22.51 14.87,22.5 | 19.91,17.59 arc-45 19.66,16.98 19.48,16.79 17.89,16.79 arc-45 17.73,16.86 16.87,17.72 16.87,18.74 16.7,18.91 14.64,18.91 14.6,18.87 14.22,18.87 13.45,19.64 13.45,21.3 14.65,22.5 14.87,22.5 | 16.51,22.04 16.49,22.05 C19.1 | IC3.3 16.64,22.75 16.6,22.56 16.57,22.37 | 16.57,22.37 16.51,22.04 | 16.51,22.04 16.45,21.75 arc45 16.52,21.57 16.57,21.53 16.57,21.47 16.93,21.11 16.99,21.11 17,21.09 | 14.87,22.5 15.09,22.5 15.14,22.45 15.64,22.45 16.57,22.37 | 17,21.09 C34.2 IC2.C2 | 17,21.09 17.44,21.08 | IC3.7 18.69,22.44 19.23,22.44 19.87,23.08 19.87,23.75 19.74,23.89
ALERT  (via drill 0.2)
  Top 0.15: U3.5 12.92,24.38 arc-45 v12.6,24.51 | U1.J24 20.91,12.58 20.89,12.58 20.68,12.79 arc90 20.42,13.05 | 20.42,13.05 | v18.38,17.72 18.3,17.8 v17.54,19.39 | 20.42,13.05 20.42,13.41 20.16,13.68 19.78,13.68 19.25,13.14 v19.16,13.14
  Bottom 0.15: v12.6,24.51 arc-45 13.48,24.15 14.38,23.24 14.43,23.24 14.66,23.02 14.66,22.83 14.97,22.52 15.1,22.52 15.49,22.14 arc-45 15.74,21.53 v17.54,19.39 | v18.38,17.72 18.38,17.57 18.7,17.26 18.7,13.64 19.16,13.18 v19.16,13.14
D+  (via drill 0.2)
  Top 0.15: 25.83,19.69 arc-45 26.05,19.18 26.05,18.06 26.39,17.72 26.39,17.07 26.05,16.73 U1.AD6 | 25.83,19.69 arc45 25.83,19.69 | 25.84,19.7 arc45 25.83,19.69 | D3.4 arc45 22.49,22.67 21.96,22.67 v21.89,22.73 | 25.84,19.7 arc-45 25.84,19.7 | 25.84,19.7 arc45 25.88,19.7 arc-45 25.84,19.66 arc45 v25.7,19.52
  Bottom 0.15: v21.89,22.73 22.91,21.71 23.67,21.71 25.7,19.68 v25.7,19.52
D-  (via drill 0.2)
  Top 0.15: v25.72,22.6 arc-45 25.59,22.54 D3.6 | v26.99,19.9 26.84,19.9 26.84,19.96 arc45 26.55,19.25 26.55,17.99 26.69,17.84 26.69,16.82 26.55,16.67 U1.AD4
  Bottom 0.15: v25.72,22.6 25.88,22.44 arc-45 26.84,20.13 26.84,19.9 v26.99,19.9
DN
  Top 0.15: J4.A7 22.47,26.84 arc-45 22.19,26.17 21.49,25.47 arc45 21.25,24.88 22.36,23.78 24.42,23.78 24.68,24.04 D3.1 24.68,26.05 arc90 24.12,26.61 24,26.61 arc-90 23.47,27.14 J4.B7
DP
  Top 0.15: D3.3 22.78,27.36 23,27.58 J4.A6 22.92,29.45 arc90 22.49,29.87 arc90 21.92,29.29 J4.B6
EPD_3V3
  Top 0.15: Q1.3 9.9,6.77
  Top 0.3: L5.1 7.06,7.65 arc-45 C1_EP_DR.1 7.05,6.77 7.19,6.9 9.24,6.9 9.37,6.77 9.9,6.77
EPD_BUSY  (via drill 0.2)
  Top 0.15: J1.9 12.3,19.52 arc45 v12.46,19.58 | U1.AD12 24.55,16.53 24.42,16.66 24.42,16.97 24.6,17.15 v24.6,17.39
  Bottom 0.15: v12.46,19.58 12.83,19.21 12.83,17.54 arc90 13.07,17.3 15.45,17.3 16.52,17.89 17.06,18.11 18.33,18.27 19.15,18.62 21.17,18.62 22.02,18.15 22.02,18.01 22.15,17.88 22.79,17.88 23.17,17.5 arc45 24.08,17.12 24.33,17.12 v24.6,17.39
EPD_CS  (via drill 0.1, 0.2)
  Top 0.15: J1.12 12.89,18.02 arc-45 13.68,17.69 13.68,17.65 14.5,16.83 v14.5,16.57 | v27.05,12.68 U1.K2
  Bottom 0.15: v27.05,12.68 21.68,12.26 arc-45 21.09,12.02 21.06,12.05 21.06,12.35 20.79,12.61 18.59,12.61 14.63,16.57 v14.5,16.57
EPD_DC  (via drill 0.2)
  Top 0.15: J1.11 12.58,18.52 13.69,18.17 v14.03,18.17 | v24.97,18.27 25.05,17.36 25.18,17.23 25.18,16.67 25.05,16.53 U1.AD10
  Bottom 0.15: v24.97,18.27 v24.97,18.26 24.75,18.48 23.36,18.48 22.47,19.36 19.2,19.36 18.21,18.99 17.56,18.85 17.13,18.85 17.08,18.9 14.91,18.9 arc45 14.66,18.79 v14.03,18.17
EPD_RST  (via drill 0.1, 0.2)
  Top 0.15: v13.38,18.84 11.31,18.93 J1.10 | v24.78,15.99 v24.78,15.99 arc-45 U1.AC11
  Bottom 0.15: v13.38,18.84 13.25,18.72 13.25,17.83 arc90 13.47,17.61 14.82,17.61 15.66,17.93 16.91,18.45 17.81,18.56 19.21,18.96 21.29,18.96 22.32,18.37 arc90 22.52,18.18 23.23,18.18 23.24,18.17 23.92,18.17 24.14,17.95 24.15,17.95 | 24.15,17.95 24.15,17.96 v24.15,18.02 | 24.15,17.95 24.64,17.95 25.02,17.57 25.02,16.85 25.06,16.81 25.06,16.25 24.82,16.01 arc-45 v24.78,15.99
GDR  (via drill 0.2)
  Top 0.15: Q3.1 7.58,5.94 7.69,5.72 R2_EP_DR.2 6.5,5.57 arc90 5.76,4.83 5.76,3.94 5.94,3.76 5.94,2.04 5.98,2 v5.98,1.95 | v13.73,22.54 13.72,22.52 J1.2
  Bottom 0.15: v5.98,1.95 5.98,2.62 7.24,3.87 8.12,4.76 8.22,4.9 8.22,5.29 9.66,6.72 9.78,6.72 10.11,6.75 10.44,6.83 10.75,6.96 11.03,7.13 11.24,7.31 11.81,7.88 arc45 12.75,10.14 12.75,14.86 arc90 12.35,15.25 11.84,15.25 arc-90 11.46,15.63 11.46,19.12 11.42,19.16 11.42,20.01 11.46,20.05 11.46,21.76 arc-90 12.21,22.51 13.7,22.51 v13.73,22.54
GND  (via drill 0.2, 0.35)
  Top 0.15: 36.18,4.79 36.17,4.81 | 13.62,15.45 13.75,15.32 13.75,15.15 EPDC6.1 13.75,14.87 13.75,14.7 13.58,14.52 13.61,14.48 13.64,14.48 13.78,14.35 13.78,14.18 EPDC8.1 | 13.62,15.45 13.59,15.45 13.55,15.5 | 13.62,15.45 13.9,15.73 EPDC5.1 14,16.12 14,16.52 | 27.76,27.9 27.76,27.98 | C4.2 18.05,15.59 C22.2 | 14.13,27.48 C27.1 | X1.2 X1.4 | R_TYPE_SEL.1 8.08,3.58 SJ1.2 | C13.2 C12.2 | IC9.C1 IC9.C2 IC9.C3 | U3.9 U3.6 | U3.1 15.01,26.17 15.01,25.89 14.85,25.74 14.77,25.74 U3.9 | U3.4 13.78,26.17 13.78,25.89 13.94,25.74 14.02,25.74 U3.9 | J1.8 11.24,20.02 12.06,20.33 EPDC2.1 EPDC1.1 | U1.F23 21.68,11.83 21.7,11.83 23.06,13.2 U1.74 25.42,11.42 25.55,11.07 U1.B7 arc-45 26,9.95 26,9.94 | 16.15,21.26 C34.1 | IC2.B1 arc-45 18.69,21.07 18.95,21.33 | IC3.8 IC3.9 19.34,23.39 arc-45 19.39,23.37 arc45 19.38,23.37 arc45 19.37,23.38 arc-45 19.37,23.29 arc-45 19.18,23.48 arc-45 v19.18,23.63 | R3.1 16.51,23.82 arc-90 16.47,23.77 | C11.2 18.57,10.98 18.84,11.25 18.85,11.25 19.04,11.45 C10.2 | U1.F23 21.49,11.7 21.15,12.04 21.19,12.04 21.39,11.83 21.41,11.83 U1.F23 | 39.6,29.19 38.07,29.07 J2.5 J2.3 | C23.1 C24.1 | R9.1 C37.1 arc-45 15.67,29.47 IC1.D2 | IC9.C1 IC9.B1 | IC9.C1 10.97,29.21 11.07,29.21 11.45,29.59 11.5,29.59 v12.06,29.77
  other vias: 26.76,3.54 16.16,3.31 4.98,4.88 38.08,3.44 27.66,24.83 24.13,7.98 12.56,26.13 29.91,10.41 28.43,18.25 20.52,21.86 16.39,23.77 21.39,26.08 23.34,26.23
  pour Top: 7.04,10.59 7.02,10.57 6.99,10.55 0.05,10.55 0.05,7.03 0.1,6.04 0.26,5.05 0.52,4.09 0.88,3.16 1.33,2.27 1.87,1.43 2.5,0.66 3.2,-0.05 3.98,-0.67 4.81,-1.22 5.7,-1.67 6.63,-2.03 7.6,-2.28 8.58,-2.44 9.5,-2.49 9.5,1.85 9.51,1.87 9.53,1.9 9.56,1.91 14.39,1.91 14.42,1.9 14.44,1.87 14.45,1.85 14.45,0.11 20.5,0.11 20.5,1.85 20.51,1.87 20.53,1.9 20.56,1.91 25.39,1.91 25.42,1.9 25.44,1.87 25.45,1.85 25.45,0.11 31.5,0.11 31.5,1.85 31.51,1.87 31.53,1.9 31.56,1.91 36.39,1.91 36.42,1.9 36.44,1.87 36.45,1.85 36.45,0.11 38.97,0.11 39.75,0.15 40.52,0.28 41.26,0.5 41.98,0.79 42.66,1.17 43.29,1.62 43.87,2.14 44.39,2.71 44.84,3.35 45.21,4.03 45.51,4.74 45.73,5.49 45.86,6.26 45.9,7.03 45.9,28.03 45.86,28.81 45.73,29.57 45.51,30.32 45.21,31.04 44.84,31.71 44.39,32.35 43.87,32.93 43.29,33.44 42.66,33.89 41.98,34.27 41.26,34.57 40.52,34.78 39.75,34.91 38.97,34.95 6.98,34.95 6.2,34.91 5.43,34.78 4.69,34.57 3.97,34.27 3.29,33.89 2.66,33.44 2.08,32.93 1.56,32.35 1.11,31.71 0.74,31.04 0.44,30.32 0.23,29.57 0.1,28.81 0.05,28.03 0.05,24.51 6.99,24.51 7.02,24.5 7.04,24.47 7.05,24.45 7.05,10.62
  pour Bottom: 48.59,0.65 48.59,35.05 48.55,35.05 48.53,35.06 44.54,39.05 0.5,39.05 -1.25,37.29 -1.25,-1.79 -1.17,-1.71 -1.15,-1.7 46.24,-1.7
  pour Route2: -0.16,0.19 46.35,0.19 46.35,35.07 0.48,35.07 -0.16,35.01
  pour Route15: 47.56,-0.16 47.59,-0.17 47.93,-0.52 47.93,34.66 47.95,34.69 47.99,34.74 47.99,35.08 47.75,35.32 28.67,35.32 28.64,35.34 28.51,35.47 28.5,35.5 28.5,37.9 28.51,37.93 28.68,38.1 12.07,38.1 12.04,38.11 12.04,35.62 12.03,35.59 11.49,35.05 11.46,35.04 -0.28,35.04 -0.28,-0.14 -0.29,-0.16
HAPTIC_EN  (via drill 0.2, 0.35)
  Top 0.15: IC2.A1 19.48,20.94 arc45 19.72,21.04 v19.96,21.28 | 28.34,14.43 v28.43,14.34
  Top 0.152: U1.U1 28.32,14.45 28.34,14.43
  Bottom 0.15: v28.43,14.34 28.28,14.34 28.22,14.28 arc45 26.6,18.18 25.69,19.09 25.52,19.09 25.27,19.34 25.27,19.68 23.68,21.27 21.47,21.27 21.37,21.17 20.96,21.17 20.77,21.36 20.15,21.36 arc45 v19.96,21.28
IMU_INT1  (via drill 0.2)
  Top 0.15: IC3.5 17.62,22.11 v17.24,21.72 | U1.N1 arc-90 27.57,13.47 27.66,13.47 27.95,13.76 28.59,13.76 28.88,13.47 29.61,13.47 v29.8,13.27
  Route2 0.15: v17.24,21.72 18.75,18.94 19.74,18.94 26.86,11.83 29.84,11.83 30.93,12.92 30.93,13.06 arc90 30.43,13.56 v29.8,13.27
IMU_INT2  (via drill 0.1, 0.2)
  Top 0.15: IC3.6 18.12,22.87 v17.84,23.15
  Top 0.152: U1.P2 U1.P2 arc-90 v27.04,13.7 arc-90 v27.05,13.71
  Route2 0.15: v27.05,13.71 27.05,13.81 26.32,14.54 26.32,17.74 24.98,19.08 24.67,19.08 21.32,22.43 21.32,22.82 20.56,23.58 | v17.84,23.15 17.87,23.15 arc-45 17.95,23.34 arc-45 18.16,23.86 18.45,24.15 arc-45 18.97,24.36 19.26,24.36 arc-45 20.15,23.99 20.56,23.58 | 20.56,23.58
LX1
  Top 0.15: 10.17,28.75 IC9.B3 | 10.17,28.75 IC9.B2 | L7.1 8.64,27.42 9.95,28.73 10.15,28.73 10.17,28.75
LX2
  Top 0.15: IC9.D2 IC9.D3 L7.2
MOSI  (via drill 0.1, 0.2)
  Top 0.15: J1.14 12.29,17.02 arc-90 12.61,16.7 arc90 12.61,16.64 arc90 v12.53,16.57 | v24.29,10.44 arc90 U1.B13
  Bottom 0.15: v26.31,7.11 25.92,6.72 16.8,6.72 15.74,7.77 arc-45 13.64,12.84 13.64,15.6 arc90 13.53,15.71 13.1,16.14 12.91,16.14 12.66,16.39 12.66,16.44 v12.53,16.57 | v26.31,7.11 26.31,7.83 24.97,9.17 24.97,9.74 24.3,10.41 arc-45 v24.29,10.44 | v26.31,7.11 v26.31,7.1 v26.31,7.09
N$1
  Top 0.15: IC1.D1 R9.2
N$2
  Top 0.15: R4.2 11.35,29.9 11.33,29.9 11.04,29.61 10.97,29.61 IC9.D1
N$4
  Top 0.15: IC9.E1 R2.2
N$5
  Top 0.15: L2.1 L3.2
N$6
  Top 0.15: L2.2 arc90 33.4,11.57 33.4,8.51 arc-90 32.87,7.98 | 32.87,7.98 | 32.87,7.98 32.77,7.98 32.72,7.93 30.57,7.93 arc45 28.94,7.26 28.94,7.17 arc-90 28.59,6.81 27.77,6.81 26.44,8.14 26.44,8.58 26.71,8.85 26.71,9.35 26.73,9.37 U1.B3
N$7
  Top 0.15: C5.1 U1.C1
N$8  (via drill 0.35)
  Top 0.15: C16.1 36.14,8.18 C15.1 L3.1 arc90 33.71,9.35 33.71,8.35 arc-90 33.07,7.7 33.06,7.7 33,7.69 32.99,7.68 arc-90 32.94,7.63 30.58,7.63 arc45 29.34,7.12 29.23,7 29.23,6.87 28.88,6.53 28.76,6.53 28.73,6.53 28.65,6.45 27.78,6.45 arc-45 27.38,6.62 27.03,6.96 27.03,7.12 26.51,7.64 26.41,7.64 25.88,8.17 25.88,8.87 v26.11,9.1 26.41,9.8 26.41,10.33 arc90 U1.B5 | v20.05,11.98 20.51,11.98 U1.E24 C10.1
  Bottom 0.15: v20.05,11.98 20.55,11.48 25.09,10.92 arc-90 25.27,10.74 25.27,9.53 arc90 25.71,9.1 v26.11,9.1
N$9  (via drill 0.2)
  Top 0.15: U1.D2 27.05,10.71 27.16,10.6 27.16,10.17 27.08,10.09 27.08,8.79 26.97,8.68 v26.97,8.36 | C17.2 29.23,9.25 29.23,9.09 29.39,8.93 | 29.39,8.93 29.86,8.93 30.41,9.49 X2.1 | v29.14,8.62 29.39,8.87 29.39,8.93
  Bottom 0.15: v29.14,8.62 29.11,8.6 27.21,8.6 v26.97,8.36
N$10
  Top 0.15: C13.1 U1.A18
N$11
  Top 0.15: R3.2 IC3.1
N$12
  Top 0.15: U1.F2 27.28,11.7 27.39,11.58 27.7,11.58 27.81,11.7 28.06,11.7 arc-11 C18.2 28.54,11.81 28.54,11.97 28.67,12.11 29.14,12.11 29.27,11.97 29.27,11.85 29.58,11.54 30.02,11.54 30.47,11.99 X2.2
N$14
  Top 0.15: C11.1 19.33,10.81 19.47,10.67 20.56,10.67 20.7,10.81 21.16,10.81 U1.D23
N$15
  Top 0.15: U1.AC5 26.78,15.95 26.89,16.06 28.77,16.06 C20.1
N$16
  Top 0.15: U1.B24 arc-90 20.81,10.21 C1.1 20.11,10.06 20.11,9.9 19.98,9.76 19.7,9.76 18.92,8.98 X1.1
N$17
  Top 0.15: X1.3 arc90 17.98,6.98 19.26,6.98 arc90 19.51,7.22 19.51,9.03 19.89,9.41 20.14,9.41 C2.1 21.25,9.65 U1.A23
N$18
  Top 0.15: IC2.A2 19.31,20.39 C32.2
N$19  (via drill 0.1, 0.25)
  Top 0.15: L1.1 18.28,11.44 arc90 C3.1 19.17,12.33 v19.97,13.22 | v21.51,12.68 21.51,12.23 arc90 U1.H23
  Bottom 0.15: v19.97,13.22 20.12,13.09 21.1,13.09 21.5,12.69 arc-45 v21.51,12.68
N$20  (via drill 0.35)
  Top 0.15: C4.1 18.04,15.09 C22.1 | L1.2 arc90 17.35,14.24 C22.1 | C22.1 16.83,15.08 v16.63,15.29 | ANT1.1 arc45 1.82,27.6 2.72,26.7 5.4,26.7 5.53,26.83 5.53,27.44 v5.73,27.64
  Bottom 0.15: v16.63,15.29 14.92,16.99 12.66,16.99 12.53,17.13 12.53,18.91 12.03,19.41 12.03,19.76 12.26,19.99 12.26,20.46 14.04,22.24 14.08,22.24 arc45 14.26,22.68 14.26,22.73 arc45 14.18,22.94 13.7,23.42 arc45 12.46,23.93 10.56,23.93 arc-45 8.53,24.77 5.73,27.57 v5.73,27.64
N$22
  Top 0.15: C9.1 18.54,14.23 20.03,14.23 20.81,13.45 U1.N24
N$23
  Top 0.15: D4.2 4.5,6.66 4.27,6.66 D2.1 | 3.8,6.19 3.8,6.59 D2.1 | C2-EP-DR.1 3.71,8.05 D2.1
N$24
  Top 0.15: Q3.3 8.21,9.47 arc90 7.79,9.89 6.35,9.89 arc90 L5.2 4.22,9.26 3.07,9.26 arc90 C2-EP-DR.2 2.13,7 D5.2
N$27
  Top 0.15: J1.4 11.76,22.02 arc-90 EPDC1.2
N$28
  Top 0.15: R1_USB.2 24.14,27.82 arc90 23.87,28.09 23.87,28.6 arc-90 J4.A5
N$29
  Top 0.15: R1_EP_DR.1 8.35,4.91 R_TYPE_SEL.2 8.01,4.6 7.8,4.6 SJ1.1
N$30
  Top 0.15: R2_USB.1 20.95,28.06 J4.B5
N$31
  Top 0.15: J1.5 11.41,21.52 arc-90 EPDC2.2
N$40
  Top 0.15: 12,16.02 EPDC5.2 | 12,16.02 J1.16 arc-90 J1.16 | J1.15 11.5,16.52 arc-90 12,16.02
N$41
  Top 0.15: EPDC6.2 J1.18 arc-90 J1.18
N$42
  Top 0.15: EPDC7.2 11.23,14.51 arc-90 J1.19
N$43
  Top 0.15: EPDC8.2 arc-90 13.39,14.02 J1.20
N$44
  Top 0.15: J1.22 arc90 11.23,13.01 11.85,13.01 11.89,13.05 12.87,13.05 12.92,13.01 EPDC10.2
N$46
  Top 0.15: J1.24 11.22,11.89 11.72,11.38 12.17,11.38 12.45,11.1 EPDC12.2
OUT+
  Top 0.15: IC2.A3 arc45 19.36,19.37 19.49,19.24 20.62,19.24 20.62,19.28 TP_OP.TP
OUT-
  Top 0.305: TP_ON.TP 16.5,19.93 17,19.93 17.08,20.01 17.82,20.01 IC2.C3
P0.13  (via drill 0.2)
  Top 0.15: U1.AD8 25.55,17.1 v25.86,17.44 | v32.45,6.1 31.99,5.65 R5.1 C30.2 31.79,4.81 SW_UP.2
  Bottom 0.15: v32.45,6.1 31.74,6.81 31.74,11.1 arc45 31,12.9 30.76,13.14 arc45 30.33,13.32 30.33,13.05 30.12,12.85 29.34,12.85 29,13.19 27.7,13.19 27.54,13.35 27.6,13.41 27.6,13.94 arc45 26.78,15.92 25.9,16.8 25.9,17.4 v25.86,17.44
P0.14  (via drill 0.1, 0.25)
  Top 0.15: R8.1 C31.2 20.26,4.97 arc-90 20.73,5.43 20.88,5.43 arc-90 21.54,4.77 21.31,4.77 SW_ENT.2 | U1.AC9 25.8,15.99
  Top 0.152: v25.8,15.99 25.8,15.99 | v18.87,4.78 18.88,4.8 R8.1
  Bottom 0.15: v18.87,4.78 19.26,4.37 28.19,4.41 31.78,5.47 32.38,5.47 arc45 32.8,5.65 arc45 32.99,6.12 32.99,6.44 32.08,7.04 32.04,10.58 32.04,12.28 30.52,13.8 29.58,13.8 29.41,13.63 28.71,13.63 28.59,13.76 28.26,13.76 27.9,14.12 27.9,14.19 27.82,14.67 27.67,15.13 27.67,15.37 27.39,15.66 27.09,16.62 26.22,18 25.67,18 25.33,17.66 25.33,17.09 arc90 25.41,17.02 25.41,17.01 25.41,16.37 25.69,16.1 v25.8,15.99
P0.31
  Top 0.15: U1.A8 U1.B9
P1.01  (via drill 0.1, 0.35 pad 0.1)
  Top 0.15: R_PWR_EPD.1 10.65,9.16 Q1.1 10.41,9.95 v10.14,9.95 | U1.Y23 v21.51,15.71
  Route2 0.15: v21.51,15.71 20.87,15.07 20.87,14.89 20.52,14.53 14.73,14.53 v10.14,9.95
P1.02  (via drill 0.2)
  Top 0.15: v13.39,8.27 13.86,8.74 arc45 14.97,11.41 14.97,13.91 14.3,14.57 14.3,15.15 arc-90 15.2,16.04 18.48,16.04 arc-90 18.96,15.55 arc90 19.94,14.57 19.98,14.57 20.02,14.53 20.52,14.53 20.79,14.81 20.91,14.81 U1.W24 | v14.46,5.52 R7.1 C29.2 11.2,6 11.2,5.83 10.5,5.13 SW_DN.2 | SW_DN.2
  Bottom 0.15: v14.46,5.52 arc-90 12.55,7.43 v13.39,8.27
PMIC_INT  (via drill 0.1, 0.2)
  Top 0.15: IC1.A1 15.24,31.07 15.18,31.07 14.68,31.58 v14.61,31.58
  Top 0.152: U1.T2 v27.05,14.66 arc-90 v27.05,14.67
  Route2 0.15: v29.19,14.16 28.59,13.76 28.17,13.76 arc-45 27.08,14.21 v27.05,14.67
  Bottom 0.15: v29.19,14.16 29.06,14.29 29.06,15.58 28.05,16.59 27.85,16.99 27.85,17.33 27.37,17.81 27.37,17.84 26.41,18.8 26.41,19.42 14.61,31.21 v14.61,31.58
PREVGH  (via drill 0.2)
  Top 0.15: J1.21 14.14,13.52 arc-45 14.32,13.45 14.32,12.36 EPDC9.2 13.87,11.9 13.63,11.9 13.62,11.9 arc45 13.48,11.55 13.48,10.23 12.94,9.69 v12.27,9.69 | v1.77,5.03 1.77,3.83 arc90 D5.1
  Bottom 0.15: v1.77,5.03 6.31,9.57 8.91,9.57 9.76,10.43 11.53,10.43 v12.27,9.69
PREVGL
  Top 0.15: J1.23 12.04,12.52 arc90 EPDC11.2 12.13,12.2 12.81,11.38 12.85,10.77 12.85,10.65 arc-90 12.62,10.42 11.77,10.42 arc45 11.7,10.39 11.69,10.39 9.93,10.45 8.09,10.23 4.04,10.23 arc90 3.7,9.89 arc-90 3.41,9.6 1.71,9.6 arc90 1.09,8.98 1.19,6.15 arc90 1.78,5.56 3.54,5.56 arc-90 3.8,5.3 3.8,3.09 D2.2
RESE  (via drill 0.2)
  Top 0.15: Q3.2 8.89,6.02 R1_EP_DR.2 8.89,3.7 arc-45 8.78,3.44 8.45,3.11 8.41,3.11 v8.33,3.19 | J1.3 11.63,22.52 arc-45 13.15,21.89 | 13.15,21.89 arc-45 13.15,21.89 | v13.11,21.93 arc-45 13.15,21.89
  Bottom 0.15: 13.15,21.89 11.84,20.58 11.84,20 11.73,19.89 11.73,19.28 11.84,19.17 11.84,16.32 arc90 12.57,15.58 arc-90 13.19,14.97 13.19,9.87 arc-45 12.44,8.08 11.5,7.14 arc-45 9.78,6.42 8.8,5.44 arc45 8.52,4.77 arc45 8.18,3.94 8.18,3.34 v8.33,3.19 | 13.15,21.89 | v13.11,21.93 13.15,21.89
RESET  (via drill 0.1)
  Top 0.15: J2.6 arc-45 37.18,30.39 37.88,31.09 arc-45 38.17,31.21 41.07,31.21 arc45 41.98,31.59 TP4.TP v41.15,30.2 | v24.29,15.98 arc-45 U1.AC13 | v29.03,23.8 v29.6,23.8 v29.61,23.79
  Route2 0.15: v24.29,15.98 21.76,18.5 arc-45 21.02,20.29 21.02,22.7 20.43,23.28 arc45 19.8,23.54 arc45 19.62,23.47 18.72,22.56 arc-45 18.39,22.43 17.28,22.43 16.83,22.88 arc-45 16.7,23.2 arc-45 16.94,23.79 17.58,24.43 arc-45 18.58,24.85 20.43,24.85 27.33,24.16 v29.03,23.8
  Bottom 0.15: v41.15,30.2 39.85,28.9 39.85,26.93 36.7,23.79 v29.61,23.79
SCK  (via drill 0.2)
  Top 0.15: J1.13 12.81,17.52 arc-90 13.5,16.83 arc90 13.46,16.78 | 13.46,16.78 arc-90 13.46,16.78 | U1.A12 24.55,9.48 arc45 25.21,7.88 v25.21,7.35 | 13.46,16.78 arc90 13.46,16.77 arc-90 13.26,16.57 arc-90 v13.08,16.57
  Bottom 0.15: v25.21,7.35 24.98,7.12 23.41,7.12 23.4,7.13 18.01,7.13 arc-45 17.1,7.51 16.98,7.51 arc-45 16.3,7.79 arc-45 13.96,13.44 13.96,15.86 13.26,16.57 v13.08,16.57
SCL  (via drill 0.1, 0.35)
  Top 0.15: 14.41,23.8 14.37,23.71 14.17,23.51 13.14,23.51 arc-45 12.54,23.76 12.27,24.03 arc-45 12.02,24.63 12.02,25 12.04,25.13 12.03,25.14 12.04,25.28 12.02,25.42 12.02,25.54 11.86,26.38 12.26,26.79 arc-45 12.49,26.88 12.56,26.88 arc90 12.82,27.14 12.82,28.39 12.56,28.64 12.56,29.68 12.82,29.93 12.82,30.17 | 14.41,23.8 arc45 U3.7 | 17.62,24.36 IC3.12 | 17.62,24.36 arc90 17.07,24.91 16.32,24.91 arc90 15.89,24.48 15.89,24.01 15.85,23.98 15.85,23.75 15.74,23.64 14.97,23.64 14.91,23.58 14.62,23.58 arc-90 14.41,23.8 | 12.82,30.17 12.81,30.16 12.34,30.64 12.34,30.72 12.2,30.85 12.13,30.85 R4.1 11.76,31.05 arc90 10.56,32.25 arc90 9.92,31.6 | 12.82,30.17 arc-45 14.04,30.67 14.06,30.69 14.06,30.91 14.3,31.15 14.67,31.15 15.15,30.67 15.24,30.67 IC1.B1 | 9.92,31.6 9.92,31.1 arc-90 R17.2 | IC2.C1 18.13,21.04 19.01,21.93 arc-45 19.15,21.98 arc45 20.01,22.34 v20.3,22.63 arc45 20.36,22.76 20.36,23.89 19.89,24.36 19.89,24.5 arc45 19.55,24.63 18.15,24.63 arc45 17.72,24.45 17.62,24.36 | v27.04,13.18 v27.04,13.19 arc-45 U1.M2 | 9.92,31.6 TP_SCL.TP
  Route2 0.15: v20.3,22.63 19.11,21.44 arc45 19.02,21.23 19.02,20.7 24.13,15.6 24.63,15.6 v27.04,13.18
SDA  (via drill 0.1, 0.2, 0.2 pad 0.1)
  Top 0.15: R18.2 11.2,31.06 arc-45 R2.1 11.29,31.11 10.86,31.53 v10.78,31.69 | U3.8 v16.15,25.48 | IC3.2 16.98,23.27 16.15,23.06 v15.92,23.06 | U1.L1 27.58,12.95 v28.17,12.36 | v18.65,20.45 arc-45 v18.65,20.45 | v18.65,20.45 IC2.B2 | 14.49,30.3 14.49,29.74 13.93,29.18 13.83,29.18 arc45 TP_SDA.TP | 14.49,30.3 IC1.C1 | 14.49,30.3 v14.49,30.72 | v14.49,30.72
  Route2 0.152: v18.65,20.45 v18.66,20.45 26.89,12.23 28.04,12.23 v28.17,12.36
  Bottom 0.15: 15.12,30.16 arc-90 14.85,29.9 13.25,29.9 11.55,31.59 arc90 11.45,31.69 v10.78,31.69 | 15.12,30.16 15.12,29.65 18.64,26.14 arc-90 18.39,25.89 v16.15,25.48 15.88,25.21 15.88,23.54 16.12,23.3 16.12,23.06 | 15.12,30.16 15.06,30.16 v14.5,30.72 v14.49,30.72
  Bottom 0.152: v15.92,23.06 16.12,23.06 16.12,21.97 16.96,21.13 18.05,21.13 arc-90 18.65,20.53 v18.65,20.45
SWDCLK  (via drill 0.35 pad 0.1)
  Top 0.15: v20.27,15.14 U1.AA24 | 34.71,32.88 34.71,31.88 arc45 35.46,30.08 J2.4 | 34.71,32.88 arc90 33.82,33.77 30.77,33.77 arc90 v29.98,32.99 | 34.71,32.88 arc-45 36.2,33.5 37.76,33.5 arc-45 39.53,32.77 TP3.TP
  Route2 0.15: v20.27,15.14 20.79,15.72 21.09,16.06 21.13,16.09 21.72,16.09 26.79,11.02 30.03,11.02 31.6,12.58 31.6,17.27 30.47,18.39 30.47,31.77 29.91,32.34 29.91,32.91 arc90 v29.98,32.99
SWDIO  (via drill 0.35 pad 0.1)
  Top 0.15: v20.27,16.15 U1.AC24 | v29.97,31.56 30.72,30.39 30.91,30.33 | J2.2 arc90 34.15,30.12 31.54,30.12 30.91,30.33 | 30.91,30.33 TP2.TP
  Route2 0.15: v20.27,16.15 21.1,16.81 arc-45 21.66,16.57 26.92,11.32 29.9,11.32 31.29,12.71 31.29,17.14 29.99,18.45 29.99,31.55 v29.97,31.56
SWO  (via drill 0.2)
  Top 0.15: U1.AD22 22.05,16.64 arc-90 22.37,16.97 arc90 22.84,17.44 22.84,18.25 23.54,18.95 v23.54,19.05 | TP1.TP 26.94,21.32 23.5,20.89 v23.51,20.85
  Bottom 0.15: v23.51,20.85 23.51,19.08 v23.54,19.05
VBAT  (via drill 0.35 pad 0.1)
  Top 0.3: U3.3 U3.2 C27.2 14.84,27.76 15.47,27.76 15.61,27.51 | 15.61,27.51 16.02,26.78 16.73,26.21 17.16,26.03 17.88,25.74 18.33,25.74 v18.68,25.39 | 15.61,27.51 16.13,28.03 arc90 16.33,28.23 C37.2 16.42,29.99 16.41,30 arc45 IC1.C2 | IC1.C2 | TP_VBAT.TP 15.58,33.68 v16.11,33.68
  Route2 0.3: v16.11,33.68 17.44,32.35 17.44,28.86 18.68,27.62 v18.68,25.39
VBUS  (via drill 0.35)
  Top 0.3: C42.2 27.56,26.74 27.93,27.1 | 27.93,27.1 arc-90 27.95,27.12 arc-90 28.42,26.64 C43.1 | 24.71,21.57 arc-90 D3.5 | 24.71,21.57 25.41,21.57 arc90 26.75,22.91 26.75,23.34 | 26.75,23.34 26.75,27.1 | 26.75,27.1 27.93,27.1 | 24.71,21.57 arc-90 24.59,21.45 23.76,21.45 23.72,21.49 23.05,21.49 arc-90 21.02,23.51 21.02,23.9 20.32,24.6 J4.A9_B4 arc-45 20.69,29.67 20.85,29.83 arc90 21.32,30.3 21.32,30.31 20.81,31.16 19.11,31.53 C38.2 IC1.A2 | U1.AD2 arc45 C21.1 27.73,17.23 v28.47,17.18 | 26.75,23.34 v27.37,23.22 | 26.75,27.1 25.51,27.1 25.18,27.43 25.17,28.04 J4.A4_B9
  Bottom 0.3: v28.47,17.18 28.47,17.25 27.75,17.96 27.75,22.84 v27.37,23.22
VREG  (via drill 0.2, 0.35 pad 0.1, 0.35 pad 0.2)
  Top 0.3: 10.95,28.06 C23.2 C24.2 | IC1.B2 arc-90 15.73,30.76 16.43,30.76 16.85,30.34 16.9,30.26 16.9,27.25 v16.59,27.09 C39.1 | TP_VREG.TP 12.76,32.88 v13.43,33.55
  Top 0.305: IC9.A3 IC9.A2 IC9.A1 10.95,28.06 v11,27.68
  Route2 0.3: 13.46,33.53 15.28,33.53 16.45,32.36 17.23,27.24 17.08,27.09 v16.59,27.09 | 13.46,33.53 11.35,33.53 9.7,31.88 9.7,28.98 v11,27.68 | v13.43,33.55 13.46,33.53
(copper drawn outside any net)
  shapes: Bottom area x1, Route15 area x1, Route2 area x1, Top area x1